# Altium PCB AcutuatorPCB.PcbDoc (part 1 of 2)
Units mm, origin at the board's own origin, x right, y up, seen from the top; angles counter-clockwise.
Board outline 80 x 80 mm, 2 copper layers (Top Layer, Bottom Layer), stack 1.57 mm thick; 63 components, 62 nets, 262 pads, 76 vias.
Unrouted connection lines stored in the file: 57.
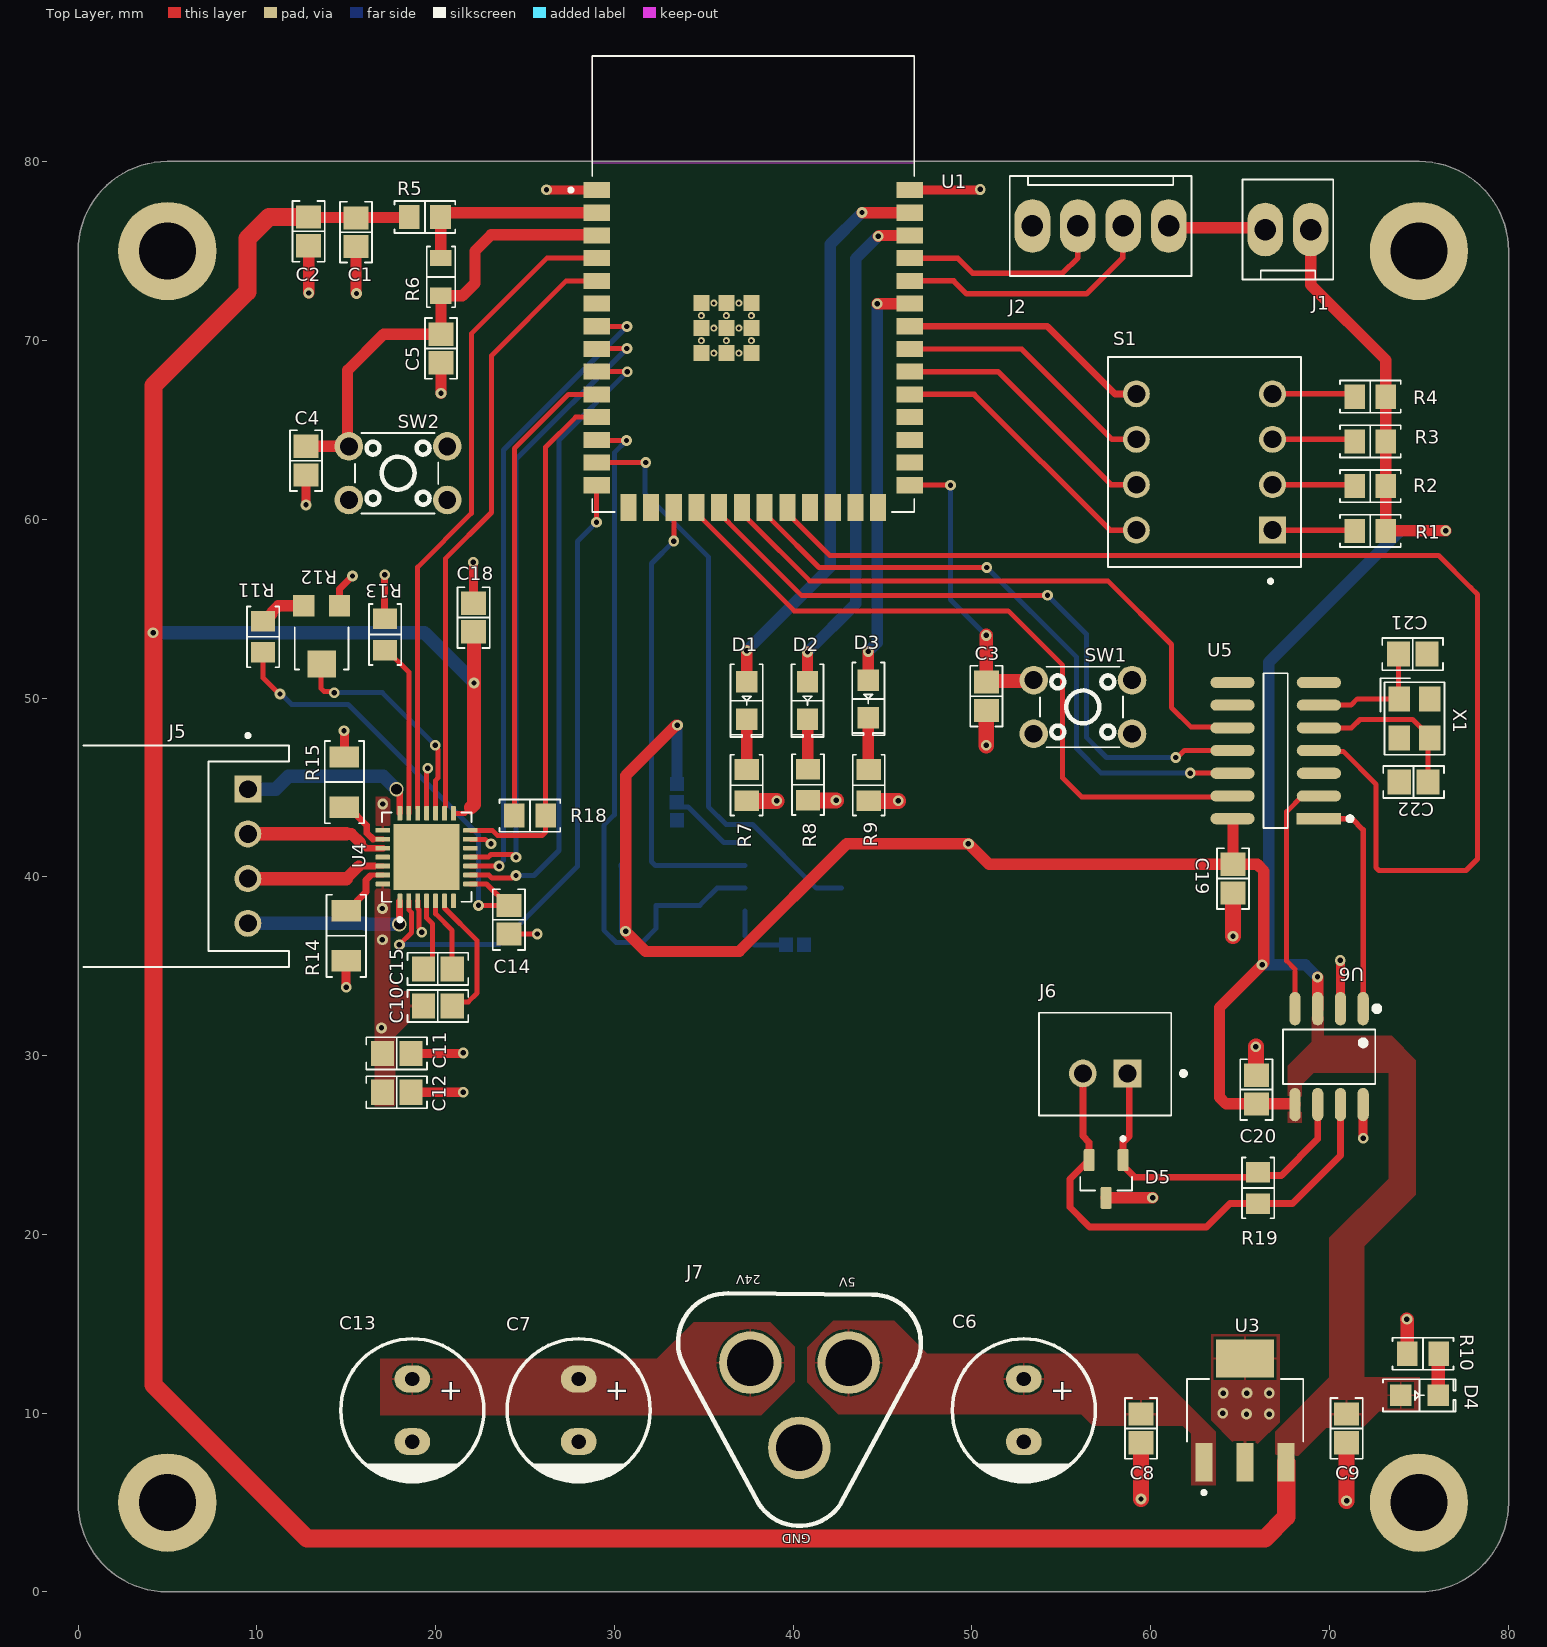
[diagram p0: Top Layer view]
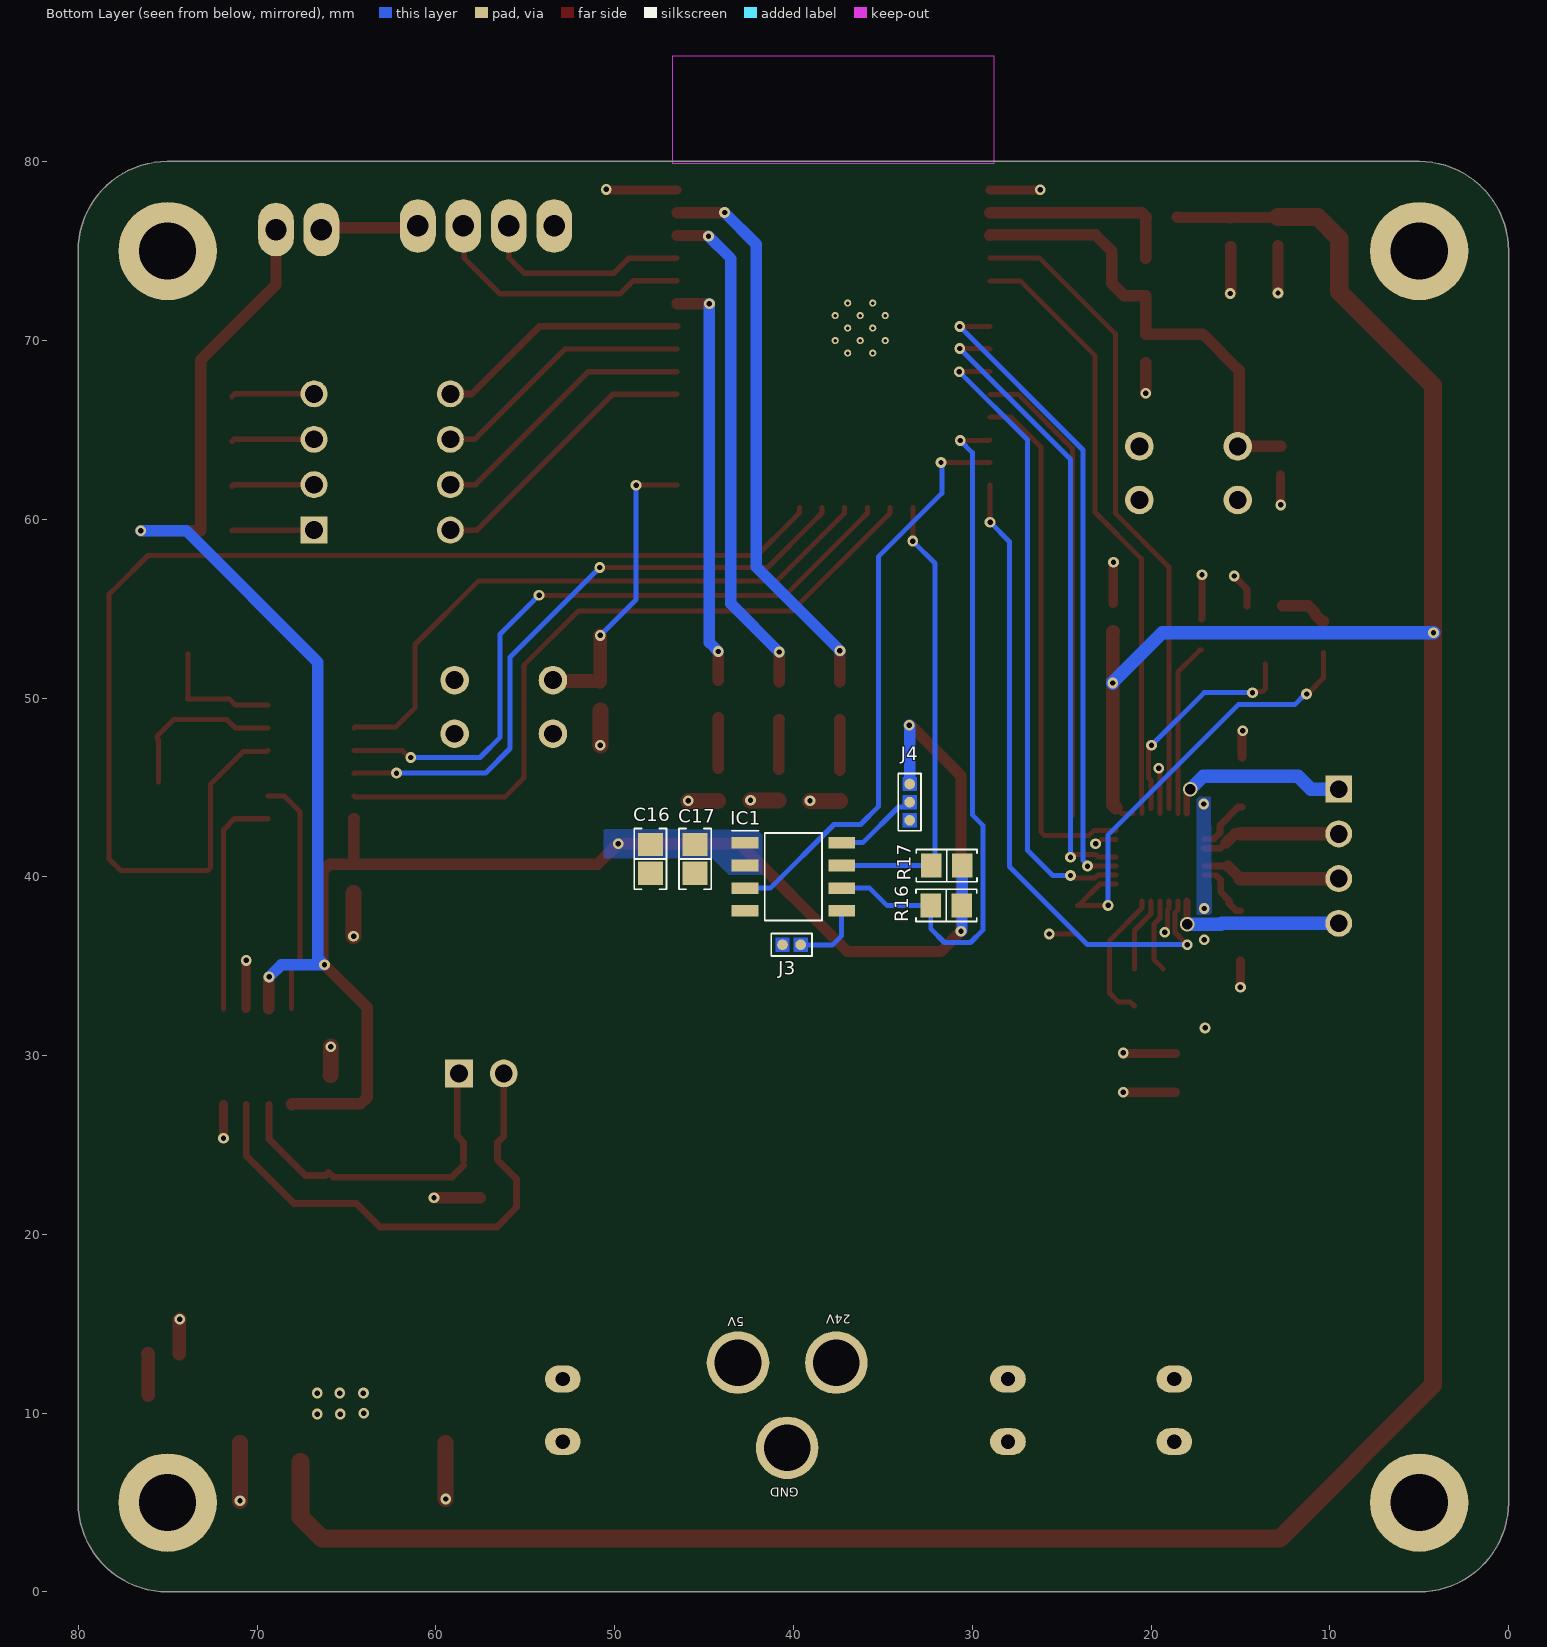
[diagram p1: Bottom Layer view, seen from below]
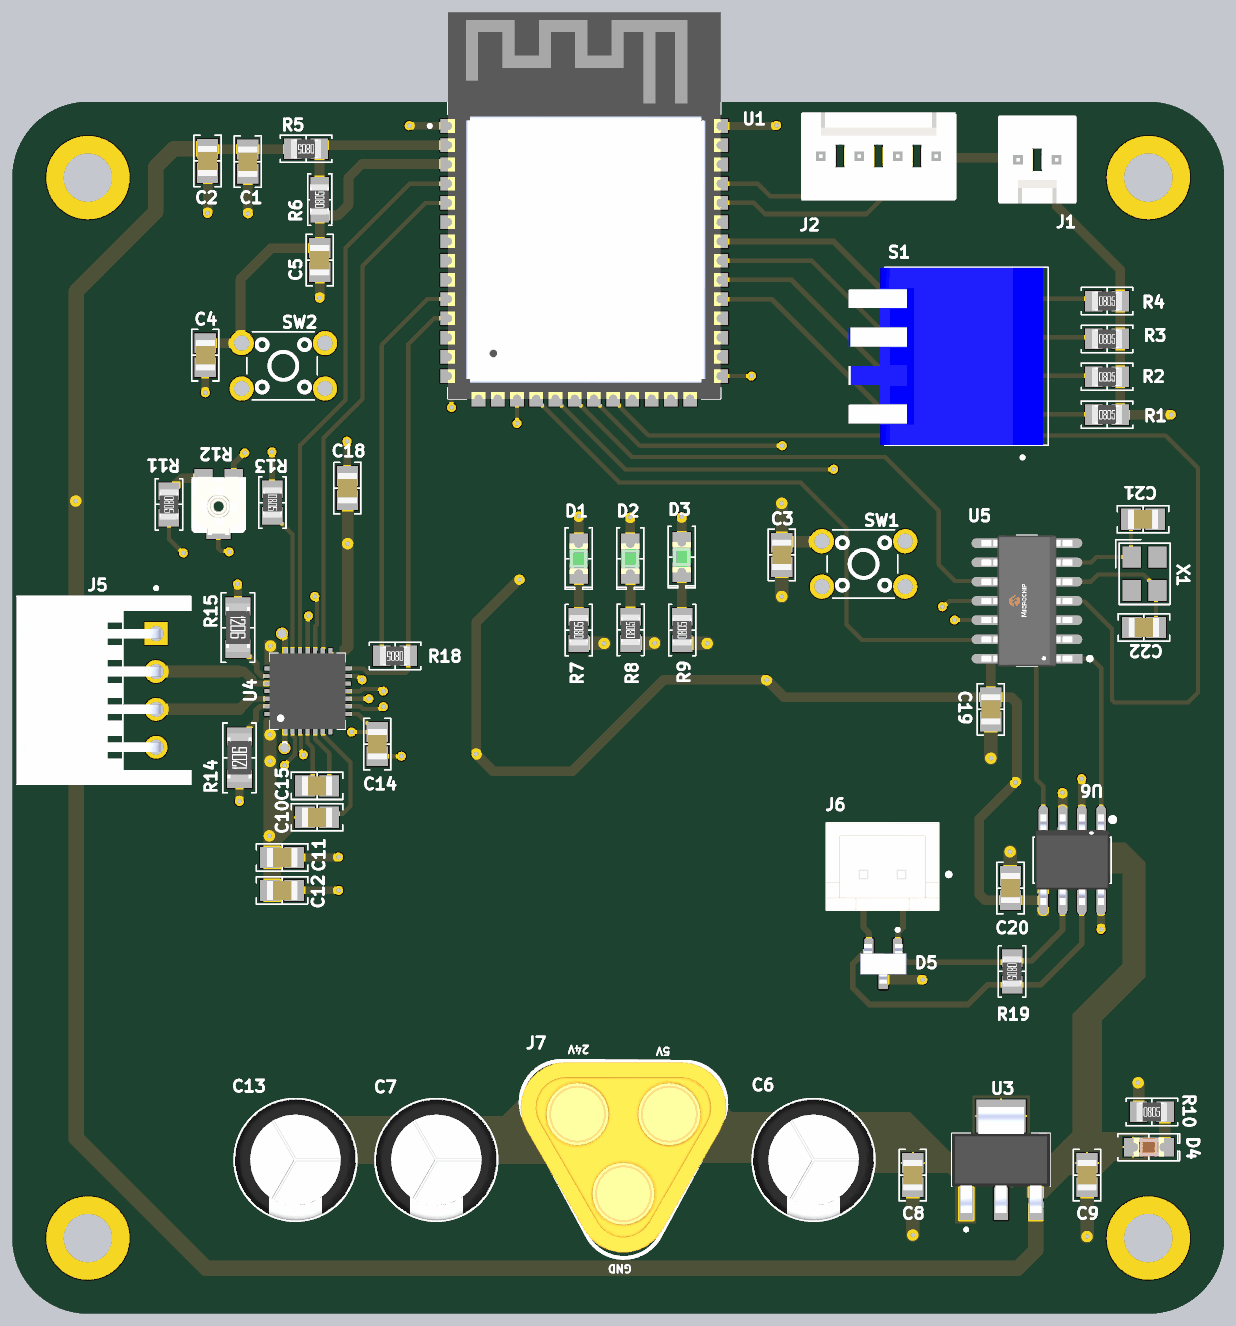
[diagram p2: 3D render of the assembled board from above, using the file's embedded part models]
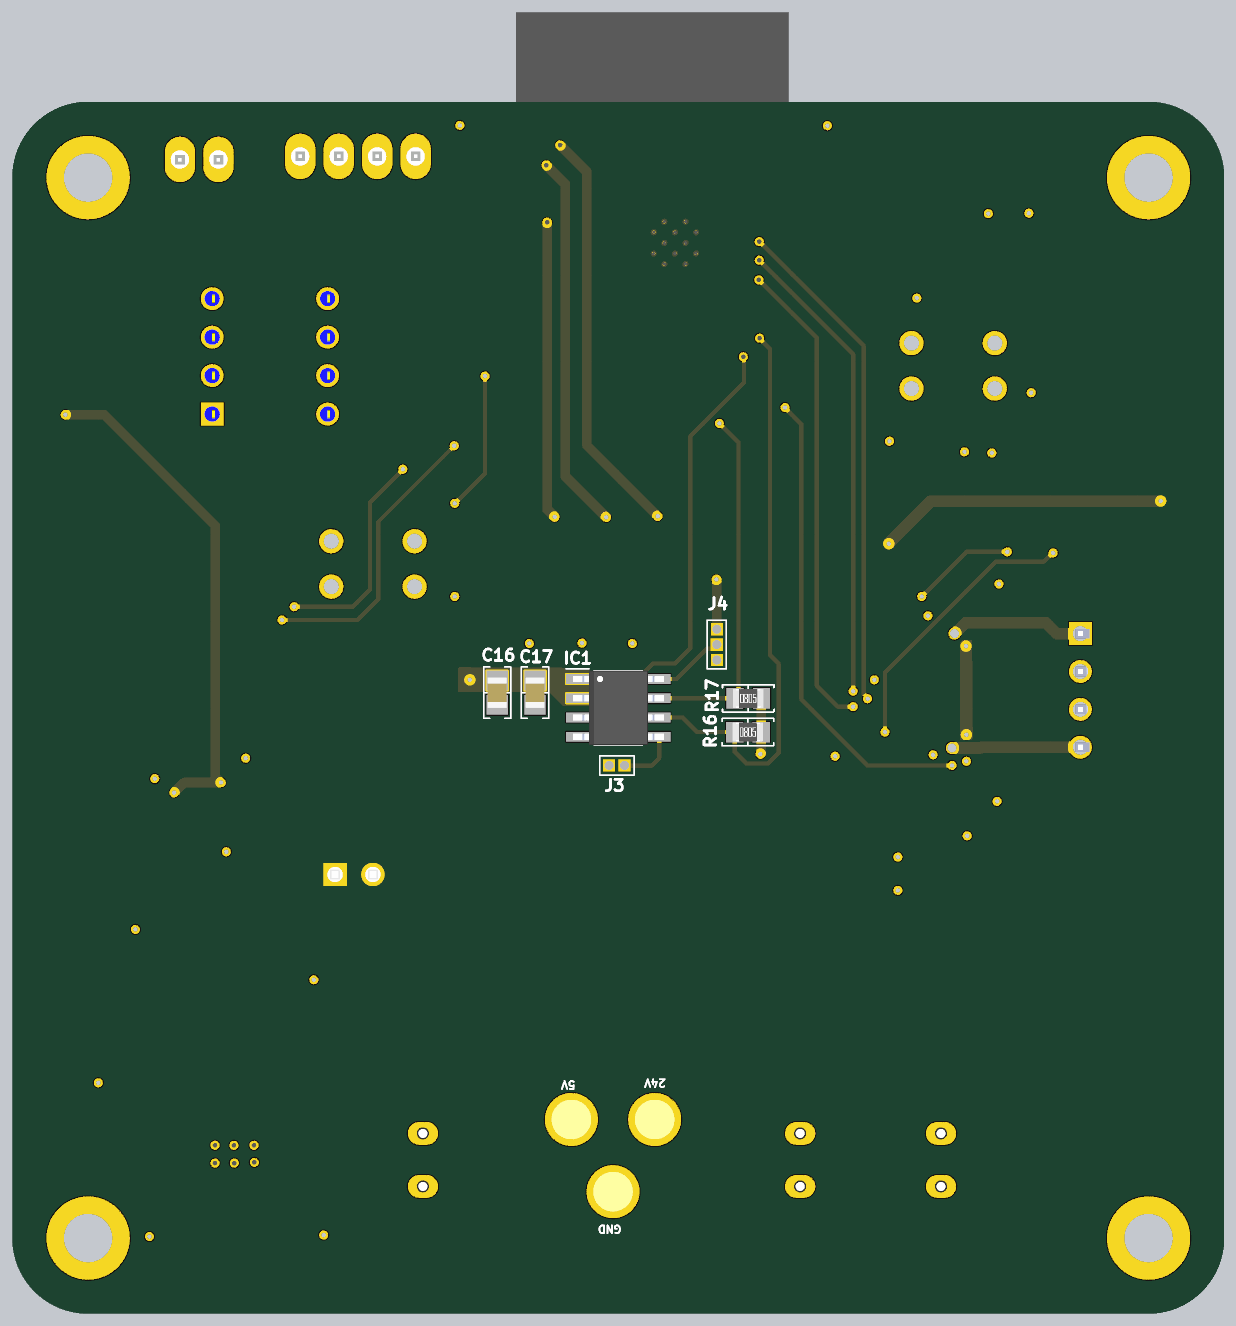
[diagram p3: 3D render of the assembled board from below, using the file's embedded part models]

## Layer stack, top to bottom
Top Solder: solder mask 0.0127, Solder Resist, Dk 3.8
Top Layer: signal copper 0.035
Dielectric: core 1.5, FR-4, Dk 4.5
Bottom Layer: signal copper 0.035
Bottom Solder: solder mask 0.0127, Solder Resist, Dk 3.8

## Board outline
0.006,5.006 0.006,75.006 cw(c5.006,75.006) 5.006,80.006 75.006,80.006 cw(c75.006,75.006) 80.006,75.006 80.006,5.006 cw(c75.006,5.006) 75.006,0.006 5.006,0.006 cw(c5.006,5.006)

## Design rules (kind name [scope] priority, off if disabled: settings)
BoardOutlineClearance [All] p1: gap=0.2 ignorepadtopadclearanceinfootprint=FALSE
Clearance [All] p1: gap=0.127 ignorepadtopadclearanceinfootprint=FALSE except(0.25: Arc-Hole Track-Hole SMDPad-Hole THPad-Hole Via-Hole Fill-Hole Poly-Hole Region-Hole Text-Hole)
ComponentClearance [All] p1: gap=0.127 collisioncheckmode=3 verticalgap=0.127 showdistances=TRUE
DiffPairsRouting [All] p1: maxlimit=0.254 minlimit=0.127 mostfreqgap=0.127 toplayer_minwidth=0.127 toplayer_maxwidth=25.4 toplayer_prefwidth=0.127 bottomlayer_minwidth=0.127 bottomlayer_maxwidth=25.4 bottomlayer_prefwidth=0.127 maxuncoupledlength=12.7
Height [All] p1: minheight=0 maxheight=1816.048 prefheight=12.7
HoleSize [All] p1: absolutevalues=TRUE maxlimit=6.3 minlimit=0.3 maxpercent=80.000 minpercent=20.000
HoleToHoleClearance [All] p1: gap=0.25 allowstackedmicrovias=FALSE
MinimumAnnularRing [All] p1: minimumring=0.076
MinimumSolderMaskSliver [All] p1: minsoldermaskwidth=0
PlaneClearance [All] p1: clearance=0.127
PlaneConnect PlaneConnectPowerPads [InPadClass('PowerPads')] p1: planeconnectstyle=Direct reliefexpansion=0.508 reliefentries=4 reliefconductorwidth=0.254 reliefairgap=0.254
PlaneConnect [All] p2: pad.planeconnectstyle=Relief pad.reliefexpansion=0.3 pad.reliefentries=4 pad.reliefconductorwidth=0.127 pad.reliefairgap=0.127 via.planeconnectstyle=Direct via.reliefexpansion=0.3 via.reliefentries=4 via.reliefconductorwidth=0.127 via.reliefairgap=0.127
PolygonConnect PolygonConnectPowerPads [All vs (InPadClass('PowerPads'))] p1: connectstyle=Direct reliefconductorwidth=0.254 reliefentries=4 polygonreliefangle="90 Angle" airgapwidth=0.254
PolygonConnect [All] p2: thpad.connectstyle=Relief thpad.reliefconductorwidth=0.127 thpad.reliefentries=4 thpad.polygonreliefangle="90 Angle" thpad.airgapwidth=0.127 smdpad.connectstyle=Relief smdpad.reliefconductorwidth=0.127 smdpad.reliefentries=4 smdpad.polygonreliefangle="90 Angle" smdpad.airgapwidth=0.127 via.connectstyle=Direct via.reliefconductorwidth=0.127 via.reliefentries=4 via.polygonreliefangle="90 Angle" via.airgapwidth=0.127
RoutingVias [All] p1: holewidth=0.3 width=0.6 viastyle="Through Hole" minholewidth=0.3 minwidth=0.6 maxholewidth=0.6 maxwidth=6.6
SilkToSilkClearance [All] p1: silktosilkclearance=0
SilkToSolderMaskClearance [IsPad] p1: minsilkscreentomaskgap=0.127 clearancetoexposedcopper=TRUE
SolderMaskExpansion [All] p1: expansion=0.075 istentingtop=FALSE
SupplyNets "Schematic Supply Nets_4" [InNet('GND')] p1: voltage=0.000
SupplyNets "Schematic Supply Nets_3" [InNet('VS')] p2: voltage=0.000
SupplyNets "Schematic Supply Nets_2" [InNet('ESP_3V3')] p3: voltage=0.000
SupplyNets "Schematic Supply Nets_1" [InNet('VCC_3V3')] p4: voltage=0.000
SupplyNets "Schematic Supply Nets" [InNet('+5')] p5: voltage=0.000
Width [All] p1: maxlimit=25.4 minlimit=0.127 preferedwidth=0.127 minimp=50.000000 maximp=50.000000 favimp=50.000000
20 further rules are at their usual default settings.

## Components (designator, comment, footprint, x,y, rotation, side; value= is the part's Value field where it differs from the comment)
C1 "0.1 µF" "CAP 0805_2012" 15.55,76.05 r90 top
C2 "10 µF" "CAP 0805_2012" 12.9,76.1 r90 top
C3 "0.1 µF" "CAP 0805_2012" 50.8,50.1 r90 top
C4 "0.1 µF" "CAP 0805_2012" 12.75,63.275 r90 top
C5 "1 µF" "CAP 0805_2012" 20.3,69.55 r90 top
C6 "100 µF" "CAP AL TH D8 L3.5 H12.5" 52.9,10.16 r270 top
C7 "100 µF" "CAP AL TH D8 L3.5 H12.5" 28,10.16 r270 top
C8 "10 µF" "CAP 0805_2012" 59.45,9.15 r90 top
C9 "10 µF" "CAP 0805_2012" 70.95,9.15 r90 top
C10 "0.1 µF" "CAP 0805_2012" 20.125,32.775 r180 top
C11 "0.1 µF" "CAP 0805_2012" 17.825,30.125 r180 top
C12 "0.1 µF" "CAP 0805_2012" 17.825,27.95 r180 top
C13 "100 µF" "CAP AL TH D8 L3.5 H12.5" 18.7,10.16 r270 top
C14 "2.2µF" "CAP 0805_2012" 24.1,37.6 r270 top
C15 "0.022 µF" "CAP 0805_2012" 20.125,34.85 r0 top
C16 "0.1 µF" "CAP 0805_2012" 48,41 r90 bottom
C17 "10 µF" "CAP 0805_2012" 45.5,41 r90 bottom
C18 "0.1 µF" "CAP 0805_2012" 22.125,54.5 r270 top
C19 "0.1 µF" "CAP 0805_2012" 64.6,39.9 r90 top
C20 "0.1 µF" "CAP 0805_2012" 65.9,28.1 r270 top
C21 "22 pF" "CAP 0805_2012" 74.65,52.45 r180 top
C22 "22 pF" "CAP 0805_2012" 74.7,45.3 r0 top
D1 "Green" "LED 0805_2012 GREEN" 37.4,49.85 r270 top
D2 "Green" "LED 0805_2012 GREEN" 40.8,49.85 r270 top
D3 "Green" "LED 0805_2012 GREEN" 44.2,49.95 r270 top
D4 "Red" "LED 0805_2012 RED" 75.025,11 r0 top
D5 "NUP2105L" SOT95P240X120-3N 57.5,23.1 r270 top
IC1 "AS5600-ASOT" SOIC127P600X175-8N 40,40 r180 bottom
J1 "0022272021" "MOLEX KK 0022272021" 67.67,76.2 r0 top
J2 "0022272041" "MOLEX KK 0022272041" 57.19,76.4 r180 top
J3 "2Pin" 2Pin 40.1,36.2 r0 bottom
J4 "3Pin" Solder_Bridge 33.5,44.175 r270 bottom
J5 "S4B-XH-A" JST_S4B-XH-A 3.8,41.15 r270 top
J6 "B2B-XH-A(LF)(SN)" FP-B2B-XH-A_LF_SN-MFG 57.45,29.525 r180 top
J7 "MT-60" MT-60 40.35,11.43 r180 top
R1 "10 kOhms" "RES 0805_2012" 72.275,59.35 r0 top
R2 "10 kOhms" "RES 0805_2012" 72.275,61.85 r0 top
R3 "10 kOhms" "RES 0805_2012" 72.275,64.35 r0 top
R4 "10 kOhms" "RES 0805_2012" 72.275,66.85 r0 top
R5 "0 Ohms" "RES 0805_2012" 19.4,76.9 r180 top
R6 "10 kOhms" "YAGEO RES 0805_2012" 20.3,73.55 r90 top
R7 "470 Ohms" "RES 0805_2012" 37.4,45.125 r90 top
R8 "470 Ohms" "RES 0805_2012" 40.825,45.15 r90 top
R9 "470 Ohms" "RES 0805_2012" 44.225,45.125 r90 top
R10 "1 kOhms" "RES 0805_2012" 75.225,13.325 r0 top
R11 "10 kOhms" "RES 0805_2012" 10.35,53.425 r270 top
R12 "10 kOhms" "POT BOURNS TRIMPOT TC33" 13.625,53.35 r180 top
R13 "100 kOhms" "RES 0805_2012" 17.175,53.55 r270 top
R14 "120 mOhms" "RES 1206_3216" 15,36.7 r90 top
R15 "120 mOhms" "RES 1206_3216" 14.9,45.3 r270 top
R16 "4.7 kOhms" "RES 0805_2012" 31.45,38.4 r180 bottom
R17 "4.7 kOhms" "RES 0805_2012" 31.425,40.625 r180 bottom
R18 "1 kOhms" "RES 0805_2012" 25.275,43.425 r180 top
R19 "120 Ohms" "RES 0805_2012" 66,22.6 r270 top
S1 "DS02C-254-1L-04BE" SW_DS02C-254-1L-04BE 63,63.2 r90 top
SW1 "4.5X4.5X5.0WATERPROOF TACT SWITCH DIP 260G" SW-TH_4P-L4.5-W4.5-P3.00-LS5.5 56.2,49.5 r180 top
SW2 "4.5X4.5X5.0WATERPROOF TACT SWITCH DIP 260G" SW-TH_4P-L4.5-W4.5-P3.00-LS5.5 17.9,62.575 r180 top
U1 "ESP32-S3-WROOM-1-N4R2" XCVR_ESP32-S3-WROOM-1-N4R2 37.765,73.15 r0 top
U3 "TL1963A-33DCYR" VREG_TL1963A-33DCYR 65.275,10.16 r90 top
U4 "TMC2209-LA-T" QFN50P500X500X90-29N 19.5,41.1 r90 top
U5 "MCP2518FDT-E/SL" FP-C04-065-SL-IPC_A 66.984,47.06 r180 top
U6 "TCAN3413DR1" TCAN3413DR1 70,30 r180 top
X1 "40MHz" CRYSTAL-SMD_4P-L3.2-W2.5-BL 74.636,48.964 r270 top

## Footprints (in the part's own frame and the unit in brackets; to place one, negate y for a bottom-side part, rotate by r counter-clockwise, add the part's x,y. Pads: shape width x height; smd on the part's side, far side on the other; paste and mask are expansions set on the pad)
2Pin [mm]
  round 0.6 smd: 1(-0.508,0) 2(0.508,0)
  Top Layer region: 0.108,0.4 0.908,0.4 0.908,-0.4 0.108,-0.4
  Top Layer region: -0.908,0.4 -0.108,0.4 -0.108,-0.4 -0.908,-0.4
  silkscreen extent -1.14,-0.64 1.14,0.64
"CAP 0805_2012" [mm] "Chip Capacitor, 2-Leads, Body 2.00x1.20mm, IPC Medium Density"
  rect 1.3x1.4 smd: 1(-0.8,0) 2(0.8,0)
  silkscreen extent -1.7,-0.9 1.7,0.9, body extent -1,-0.64 1,0.64, height 1.26
"CAP AL TH D8 L3.5 H12.5" [mm] "8MM Diameter, 3.5MM Lead Spacing Aluminium Capacitor"
  oval 1.5x2 hole 0.8: 1(-1.75,0) 2(1.75,0)
  silkscreen extent -4,-4 4,4, body extent -4,-4 4,4, height 11.5
CRYSTAL-SMD_4P-L3.2-W2.5-BL [mm]
  rect 1.4x1.2 smd: 1(-0.986,-0.736) 2(1.214,-0.736) 3(1.214,0.964) 4(-0.986,0.964)
  silkscreen extent -2.14,-1.79 2.14,1.79
FP-B2B-XH-A_LF_SN-MFG [mm]
  rect 1.55x1.55 hole 1 paste-2539.97 mask+0: 1(-1.25,0.525)
  round 1.55 hole 1 paste-2539.97 mask+0: 2(1.25,0.525)
  silkscreen extent -4.5,-2.88 3.7,2.88, body extent -3.8,-2.98 3.8,2.98, height 0.25
FP-C04-065-SL-IPC_A [mm]
  rect 2.474x0.622 smd paste+0 mask+0: 1(-2.416,3.81)
  rrect100% 2.474x0.622 smd paste+0 mask+0: 2(-2.416,2.54) 3(-2.416,1.27) 4(-2.416,0) 5(-2.416,-1.27) 6(-2.416,-2.54) 7(-2.416,-3.81) 8(2.416,-3.81) 9(2.416,-2.54) 10(2.416,-1.27) 11(2.416,0) 12(2.416,1.27) 13(2.416,2.54) 14(2.416,3.81)
  silkscreen extent -4.28,-4.33 0.68,4.33, body extent -4.15,-4.82 4.15,4.82, height 0.25
JST_S4B-XH-A [mm]
  rect 1.508x1.508 / inner round 1.508 / far side rect 1.508x1.508 hole 1: 1(-3.75,5.7)
  round 1.508 hole 1: 2(-1.25,5.7) 3(1.25,5.7) 4(3.75,5.7)
  silkscreen extent -6.85,-3.5 6.2,8, body extent -6.2,-3.5 6.2,8, height 6.1
"LED 0805_2012 GREEN" [mm] "Chip Diode, 2-Leads, Body 2.00x1.25mm, IPC Medium Density"
  rect 1.2x1.2 smd: 1(-1.05,0) 2(1.05,0)
  silkscreen extent -2.03,-0.9 2.03,0.9, body extent -1,-0.62 1,0.63, height 0.9
"LED 0805_2012 RED" [mm] "Chip Diode, 2-Leads, Body 2.00x1.25mm, IPC Medium Density"
  rect 1.2x1.2 smd: 1(-1.05,0) 2(1.05,0)
  silkscreen extent -2.03,-0.9 2.03,0.9, body extent -1,-0.62 1,0.63, height 0.9
"MOLEX KK 0022272021" [mm]
  oval 2x3 hole 1.2: 1(-1.27,0) 2(1.27,0)
  silkscreen extent -2.54,-2.79 2.54,2.79, body extent -2.54,-2.9 2.54,2.9, height 11.7
"MOLEX KK 0022272041" [mm]
  oval 2x3 hole 1.2: 1(-3.81,0) 2(-1.27,0) 3(1.27,0) 4(3.81,0)
  silkscreen extent -5.08,-2.79 5.08,2.79, body extent -5.08,-2.9 5.08,2.9, height 11.7
MT-60 [mm]
  round 3.5 hole 2.605: 1(-2.75,-1.397) 2(0,3.366) 3(2.75,-1.397)
  silkscreen extent -6.79,-5.27 6.79,7.74, body extent -6.8,-5.2 6.8,7.39, height 15
"POT BOURNS TRIMPOT TC33" [mm] "Bourns Trimpot TC33X-1 - Open Frame 3mm x 3.8mm x 1.2mm"
  rect 1.2x1.2 smd: 1(-1,-1.8) 3(1,-1.8)
  rect 1.6x1.5 smd: 2(0,1.45)
  silkscreen extent -1.5,-0.6 1.5,1.75, body extent -1.8,-1.91 1.8,1.95, height 1.15
QFN50P500X500X90-29N [mm]
  rrect25% 0.81x0.27 smd: 1(-2.45,1.5) 2(-2.45,1) 3(-2.45,0.5) 4(-2.45,0) 5(-2.45,-0.5) 6(-2.45,-1) 7(-2.45,-1.5) 15(2.45,-1.5) 16(2.45,-1) 17(2.45,-0.5) 18(2.45,0) 19(2.45,0.5) 20(2.45,1) 21(2.45,1.5)
  rrect25% 0.27x0.81 smd: 8(-1.5,-2.45) 9(-1,-2.45) 10(-0.5,-2.45) 11(0,-2.45) 12(0.5,-2.45) 13(1,-2.45) 14(1.5,-2.45) 22(1.5,2.45) 23(1,2.45) 24(0.5,2.45) 25(0,2.45) 26(-0.5,2.45) 27(-1,2.45) 28(-1.5,2.45)
  rect 3.7x3.7 smd paste-0.68: 29(0,0)
  silkscreen extent -3.6,-2.5 2.5,2.5, body extent -2.5,-2.5 2.5,2.5, height 0.9
"RES 0805_2012" [mm] "Chip Resistor, 2-Leads, Body 2.00x1.25mm, IPC Medium Density"
  rect 1.15x1.35 smd: 1(-0.875,0) 2(0.875,0)
  silkscreen extent -1.7,-0.9 1.7,0.9, body extent -1,-0.62 1,0.63, height 0.6
"RES 1206_3216" [mm] "Chip Resistor, 2-Leads, Body 3.13x1.55mm, IPC Medium Density"
  rect 1.2x1.65 smd: 1(-1.4,0) 2(1.4,0)
  silkscreen extent -2.3,-1.1 2.3,1.1, body extent -1.6,-0.8 1.6,0.8, height 0.6
SOIC127P600X175-8N [mm]
  rect 1.5x0.65 smd: 1(-2.7,1.905) 2(-2.7,0.635) 3(-2.7,-0.635) 4(-2.7,-1.905) 5(2.7,-1.905) 6(2.7,-0.635) 7(2.7,0.635) 8(2.7,1.905)
  silkscreen extent -3.45,-2.45 1.6,2.58, body extent -3,-2.45 3,2.45, height 1.75
Solder_Bridge [mm]
  round 0.6 smd: 1(-1.016,0) 2(1.016,0) 3(0,0)
  Top Layer region: 0.616,0.4 1.416,0.4 1.416,-0.4 0.616,-0.4
  Top Layer region: -1.416,0.4 -0.616,0.4 -0.616,-0.4 -1.416,-0.4
  Top Layer region: -0.406,0.406 0.406,0.406 0.406,-0.406 -0.406,-0.406
  silkscreen extent -1.6,-0.64 1.6,0.64
SOT95P240X120-3N [mm]
  rrect25% 1.23x0.6 smd paste+0 mask+0.102: 1(-1.06,0.95) 2(-1.06,-0.95) 3(1.06,0)
  silkscreen extent -2.35,-1.45 0.65,1.45, body extent -1.3,-1.52 1.3,1.52, height 1.3
SW-TH_4P-L4.5-W4.5-P3.00-LS5.5 [mm]
  round 1.6 hole 1: 1(-2.75,1.5) 2(2.75,1.5) 3(-2.75,-1.5) 4(2.75,-1.5)
  silkscreen extent -2.25,-2.25 2.4,2.25
SW_DS02C-254-1L-04BE [mm]
  rect 1.508x1.508 / inner round 1.508 / far side rect 1.508x1.508 hole 1: 1A(-3.81,-3.81)
  round 1.508 hole 1: 1B(-3.81,3.81) 2A(-1.27,-3.81) 2B(-1.27,3.81) 3A(1.27,-3.81) 3B(1.27,3.81) 4A(3.81,-3.81) 4B(3.81,3.81)
  silkscreen extent -6.77,-5.4 5.87,5.4, body extent -5.86,-5.08 5.86,7.8, height 9.46
TCAN3413DR1 [mm]
  oval 0.63x1.865 smd: 1(-1.877,-2.624) 2(-0.607,-2.624) 3(0.663,-2.624) 4(1.933,-2.624) 5(1.933,2.741) 6(0.663,2.741) 7(-0.607,2.741) 8(-1.877,2.741)
  silkscreen extent -2.79,-2.77 2.6,1.58, body extent -2.44,-2.97 2.49,3.02, height 1.73
VREG_TL1963A-33DCYR [mm]
  rect 2.15x0.95 smd: 1(-2.9,2.3) 2(-2.9,0) 3(-2.9,-2.3)
  rect 2.15x3.25 smd: 4(2.9,0)
  silkscreen extent -4.7,-3.25 1.75,3.25, body extent -3.5,-3.25 3.5,3.25, height 1.8
XCVR_ESP32-S3-WROOM-1-N4R2 [mm]
  rect 1.5x0.9 smd: 1(-8.75,5.26) 2(-8.75,3.99) 3(-8.75,2.72) 4(-8.75,1.45) 5(-8.75,0.18) 6(-8.75,-1.09) 7(-8.75,-2.36) 8(-8.75,-3.63) 9(-8.75,-4.9) 10(-8.75,-6.17) 11(-8.75,-7.44) 12(-8.75,-8.71) 13(-8.75,-9.98) 14(-8.75,-11.25) 27(8.75,-11.25) 28(8.75,-9.98) 29(8.75,-8.71) 30(8.75,-7.44) 31(8.75,-6.17) 32(8.75,-4.9) 33(8.75,-3.63) 34(8.75,-2.36) 35(8.75,-1.09) 36(8.75,0.18) 37(8.75,1.45) 38(8.75,2.72) 39(8.75,3.99) 40(8.75,5.26)
  rect 0.9x1.5 smd: 15(-6.985,-12.5) 16(-5.715,-12.5) 17(-4.445,-12.5) 18(-3.175,-12.5) 19(-1.905,-12.5) 20(-0.635,-12.5) 21(0.635,-12.5) 22(1.905,-12.5) 23(3.175,-12.5) 24(4.445,-12.5) 25(5.715,-12.5) 26(6.985,-12.5)
  rect 0.9x0.9 smd: 41_1(-1.5,-2.46) 41_2(-2.9,-2.46) 41_3(-0.1,-2.46) 41_4(-2.9,-3.86) 41_5(-1.5,-3.86) 41_6(-0.1,-3.86) 41_7(-2.9,-1.06) 41_8(-1.5,-1.06) 41_9(-0.1,-1.06)
  round 0.4 hole 0.2 mask+0: 41_10(-1.5,-1.76) 41_11(-2.9,-1.76) 41_12(-0.1,-1.76) 41_13(-2.9,-3.16) 41_14(-1.5,-3.16) 41_15(-0.1,-3.16) 41_16(-2.2,-1.06) 41_17(-0.8,-1.06) 41_18(-2.2,-2.46) 41_19(-0.8,-2.46) 41_20(-2.2,-3.86) 41_21(-0.8,-3.86)
  Keep-Out Layer region: 9,6.75 -9,6.75 -9,12.75 9,12.75
  Keep-Out Layer region: 9,6.75 -9,6.75 -9,12.75 9,12.75
  silkscreen extent -10.3,-12.75 9,12.75, body extent -9,-12.75 9,12.75, height 3.25
"YAGEO RES 0805_2012" [mm] "Chip Resistor, 2-Leads, Body 2.00x1.25mm"
  rect 0.9x1.2 smd: 1(-1.05,0) 2(1.05,0)
  silkscreen extent -1.7,-0.8 1.7,0.8, body extent -1,-0.62 1,0.63, height 0.6

## Part data
C1: library part C0805C104M5RACAUTO, "CAP CER 0.1UF 50V X7R 0805", Device Package="0805 (2012 Metric)", Manufacturer=KEMET, Operating Temperature="-55°C ~ 125°C", Ratings=AEC-Q200, Supplier Part Number 1=399-12977-1-ND, Temperature Coefficient=X7R, Tolerance=±20%, Voltage - Rated=50V, Applications="Automotive, Bypass, Decoupling", Capacitance="0.1 µF", componentlink1description=Datasheet, componentlink1url=https://api.kemet.com/component-edge/download/datasheet/C0805C104M5RACAUTO.pdf, ComponentLink2Description="DigiKey Link", ComponentLink2URL=https://www.digikey.com/en/products/detail/kemet/C0805C104M5RACAUTO/5762233, lastupdated="4/6/2026 7:33:18 PM", Lifecycle Status=Active, Minimum Order=1, Mounting Type="Surface Mount, MLCC", Package / Case="0805 (2012 Metric)", Packaging=TapeAndReel, Part Number=C0805C104M5RACAUTO, Part Status=Active, partid=2568, price=0.02, Series="SMD Auto X7R", Size / Dimension="0.079\" L x 0.049\" W (2.00mm x 1.25mm)", Supplier 1=DigiKey, Thickness (Max)="0.035\" (0.88mm)"
C2: library part CL21B106KAYQNNE, "CAP CER 10UF 25V X7R 0805", Device Package="0805 (2012 Metric)", Manufacturer="Samsung Electro-Mechanics", Operating Temperature="-55°C ~ 125°C", Supplier Part Number 1=1276-CL21B106KAYQNNECT-ND, Temperature Coefficient=X7R, Tolerance=±10%, Voltage - Rated=25V, Applications="General Purpose", Capacitance="10 µF", componentlink1description=Datasheet, componentlink1url=https://www.samsungsem.com/resources/file/global/support/product_catalog/MLCC.pdf, ComponentLink2Description="DigiKey Link", ComponentLink2URL=https://www.digikey.com/en/products/detail/samsung-electro-mechanics/CL21B106KAYQNNE/16573002, lastupdated="4/6/2026 7:29:13 PM", Lifecycle Status=Active, Minimum Order=1, Mounting Type="Surface Mount, MLCC", Package / Case="0805 (2012 Metric)", Packaging=TapeAndReel, Part Number=CL21B106KAYQNNE, partid=72453, price=0.06, Series=CL, Size / Dimension="0.079\" L x 0.049\" W (2.00mm x 1.25mm)", Supplier 1=DigiKey, Thickness (Max)="0.057\" (1.45mm)"
C3 C4 C11 C12 C16 C19 C20: library part CC0805MRX7R9BB104, "CAP CER 0.1UF 50V X7R 0805", Device Package="0805 (2012 Metric)", Manufacturer=Yageo, Operating Temperature="-55°C ~ 125°C", Supplier Part Number 1=311-4351-1-ND, Temperature Coefficient=X7R, Tolerance=±20%, Voltage - Rated=50V, Applications="General Purpose", Capacitance="0.1 µF", componentlink1description=Datasheet, componentlink1url=https://www.yageo.com/upload/media/product/productsearch/datasheet/mlcc/UPY-GPHC_X7R_6.3V-to-50V_18.pdf, ComponentLink2Description="DigiKey Link", ComponentLink2URL=https://www.digikey.com/en/products/detail/yageo/CC0805MRX7R9BB104/5884281, lastupdated="4/6/2026 7:33:19 PM", Lifecycle Status=Active, Minimum Order=1, Mounting Type="Surface Mount, MLCC", Package / Case="0805 (2012 Metric)", Packaging=TapeAndReel, Part Number=CC0805MRX7R9BB104, Part Status=Active, partid=2475, price=0.01, Series=CC, Size / Dimension="0.079\" L x 0.049\" W (2.00mm x 1.25mm)", Supplier 1=DigiKey, Thickness (Max)="0.037\" (0.95mm)"
C5: library part C2012X8R1C105K125AB, "CAP CER 1UF 16V X8R 0805", Device Package="0805 (2012 Metric)", Manufacturer="TDK Corporation", Operating Temperature="-55°C ~ 150°C", Supplier Part Number 1=445-8829-1-ND, Temperature Coefficient=X8R, Tolerance=±10%, Voltage - Rated=16V, Applications="General Purpose", Capacitance="1 µF", componentlink1description=Datasheet, componentlink1url=https://product.tdk.com/info/en/catalog/datasheets/mlcc_commercial_hightemp_en.pdf?ref_disty=digikey, ComponentLink2Description="DigiKey Link", ComponentLink2URL=https://www.digikey.com/en/products/detail/tdk-corporation/C2012X8R1C105K125AB/3248171, Features="High Temperature", lastupdated="4/6/2026 7:33:17 PM", Lifecycle Status=Active, Minimum Order=1, Mounting Type="Surface Mount, MLCC", Package / Case="0805 (2012 Metric)", Packaging=TapeAndReel, Part Number=C2012X8R1C105K125AB, Part Status=Active, partid=2997, price=0.07, Series=C, Size / Dimension="0.079\" L x 0.049\" W (2.00mm x 1.25mm)", Supplier 1=DigiKey, Thickness (Max)="0.057\" (1.45mm)"
C6: library part UKL1C101MPD1TD, "CAP ALUM 100UF 20% 16V RADIAL", Device Package="Radial, Can", Lifetime @ Temp.="2000 Hrs @ 85°C", Manufacturer=Nichicon, Operating Temperature="-40°C ~ 85°C", Ripple Current @ High Frequency="345 mA @ 10 kHz", Ripple Current @ Low Frequency="230 mA @ 120 Hz", Supplier Part Number 1=493-10478-1-ND, Tolerance=±20%, Voltage - Rated="16 V", Applications="General Purpose", Capacitance="100 µF", componentlink1description=Datasheet, componentlink1url=http://nichicon-us.com/english/products/pdfs/e-ukl.pdf, ComponentLink2Description="DigiKey Link", ComponentLink2URL=https://www.digikey.com/en/products/detail/nichicon/UKL1C101MPD1TD/4317967, Height - Seated (Max)="0.492\" (12.50mm)", lastupdated="4/5/2026 8:45:14 PM", Lead Spacing="0.138\" (3.50mm)", Lifecycle Status=Active, Minimum Order=1, Mounting Type="Through Hole", Package / Case="Radial, Can", Packaging=TapeAndBox, Part Number=UKL1C101MPD1TD, Part Status=Active, partid=7193, Polarization=Polar, price=0.16, Series=UKL, Size / Dimension="0.315\" Dia (8.00mm)", Supplier 1=DigiKey
C7: library part UKW1H101MPD1TD, "CAP ALUM 100UF 20% 50V RADIAL", Device Package="Radial, Can", Lifetime @ Temp.="2000 Hrs @ 85°C", Manufacturer=Nichicon, Operating Temperature="-40°C ~ 85°C", Ripple Current @ High Frequency="375 mA @ 10 kHz", Ripple Current @ Low Frequency="250 mA @ 120 Hz", Supplier Part Number 1=493-10760-1-ND, Tolerance=±20%, Voltage - Rated="50 V", Applications=Audio, Capacitance="100 µF", componentlink1description=Datasheet, componentlink1url=http://nichicon-us.com/english/products/pdfs/e-ukw.pdf, ComponentLink2Description="DigiKey Link", ComponentLink2URL=https://www.digikey.com/en/products/detail/nichicon/UKW1H101MPD1TD/4317338, Height - Seated (Max)="0.492\" (12.50mm)", lastupdated="4/5/2026 8:45:14 PM", Lead Spacing="0.138\" (3.50mm)", Lifecycle Status=Active, Minimum Order=1, Mounting Type="Through Hole", Package / Case="Radial, Can", Packaging=TapeAndBox, Part Number=UKW1H101MPD1TD, Part Status=Active, partid=7204, Polarization=Polar, price=0.23, Series=UKW, Size / Dimension="0.315\" Dia (8.00mm)", Supplier 1=DigiKey
C8 C9 C17: library part CL21Y106KPQVPNE, "CAP CER 10UF 10V X7S 0805", Device Package="0805 (2012 Metric)", Manufacturer="Samsung Electro-Mechanics", Operating Temperature="-55°C ~ 125°C", Ratings=AEC-Q200, Supplier Part Number 1=1276-6685-1-ND, Temperature Coefficient=X7S, Tolerance=±10%, Voltage - Rated=10V, Applications=Automotive, Capacitance="10 µF", componentlink1description=Datasheet, componentlink1url=http://www.samsungsem.com/kr/support/product-search/mlcc/CL21Y106KPQVPNE.jsp, ComponentLink2Description="DigiKey Link", ComponentLink2URL=https://www.digikey.com/en/products/detail/samsung-electro-mechanics/CL21Y106KPQVPNE/5961169, Features="General Purpose", lastupdated="4/6/2026 7:33:17 PM", Lifecycle Status=Active, Minimum Order=1, Mounting Type="Surface Mount, MLCC, Epoxy", Package / Case="0805 (2012 Metric)", Packaging=TapeAndReel, Part Number=CL21Y106KPQVPNE, Part Status=Active, partid=2979, price=0.06, Series=CL, Size / Dimension="0.079\" L x 0.049\" W (2.00mm x 1.25mm)", Supplier 1=DigiKey, Thickness (Max)="0.055\" (1.40mm)"
C10: library part 0805B104K160CT, "CAP CER 0.1UF 16V X7R 0805", Device Package="0805 (2012 Metric)", Manufacturer="Walsin Technology Corporation", Operating Temperature="-55°C ~ 125°C", Supplier Part Number 1=1292-1565-1-ND, Temperature Coefficient=X7R, Tolerance=±10%, Voltage - Rated=16V, Applications="General Purpose", Capacitance="0.1 µF", componentlink1description=Datasheet, componentlink1url=http://www.passivecomponent.com/wp-content/uploads/2018/10/MLCC.pdf, ComponentLink2Description="DigiKey Link", ComponentLink2URL=https://www.digikey.com/en/products/detail/walsin-technology-corporation/0805B104K160CT/9355062, lastupdated="4/6/2026 7:33:11 PM", Lifecycle Status=Active, Minimum Order=1, Mounting Type="Surface Mount, MLCC", Package / Case="0805 (2012 Metric)", Packaging=TapeAndReel, Part Number=0805B104K160CT, Part Status=Active, partid=4882, price=0.01, Series=-, Size / Dimension="0.079\" L x 0.049\" W (2.00mm x 1.25mm)", Supplier 1=DigiKey, Thickness (Max)="0.035\" (0.90mm)"
C13: library part ECA-1HM101, "CAP ALUM 100UF 20% 50V RADIAL TH", Device Package="Radial, Can", Lifetime @ Temp.="2000 Hrs @ 85°C", Manufacturer="Panasonic Electronic Components", Operating Temperature="-40°C ~ 85°C", Ripple Current @ High Frequency="425 mA @ 10 kHz", Ripple Current @ Low Frequency="250 mA @ 120 Hz", Supplier Part Number 1=P5182-ND, Tolerance=±20%, Voltage - Rated="50 V", Applications="General Purpose", Capacitance="100 µF", componentlink1description=Datasheet, componentlink1url=//media.digikey.com/pdf/Data%20Sheets/Panasonic%20Electronic%20Components/ECA-xxM%20Series,TypeA.pdf, ComponentLink2Description="DigiKey Link", ComponentLink2URL=https://www.digikey.com/en/products/detail/panasonic-electronic-components/ECA-1HM101/245041, Height - Seated (Max)="0.492\" (12.50mm)", lastupdated="4/5/2026 8:45:14 PM", Lead Spacing="0.138\" (3.50mm)", Lifecycle Status=Active, Minimum Order=1, Mounting Type="Through Hole", Package / Case="Radial, Can", Packaging=Bulk, Part Number=ECA-1HM101, Part Status=Active, partid=7199, Polarization=Polar, price=0.09, Series=M-A, Size / Dimension="0.315\" Dia (8.00mm)", Supplier 1=DigiKey
C14: library part 0805YD225KAT2A, "CAP CER 2.2UF 16V X5R 0805", Device Package="0805 (2012 Metric)", Manufacturer="AVX Corporation", Operating Temperature="-55°C ~ 85°C", Supplier Part Number 1=478-2580-1-ND, Temperature Coefficient=X5R, Tolerance=±10%, Voltage - Rated=16V, Applications="General Purpose", Capacitance=2.2µF, componentlink1description=Datasheet, componentlink1url=http://datasheets.avx.com/cx5r.pdf, ComponentLink2Description="DigiKey Link", ComponentLink2URL=http://digikey.com/product-detail/en/avx-corporation/0805YD225KAT2A/478-2580-1-ND/717525, lastupdated="9/2/2020 1:04:40 AM", Lifecycle Status=Active, Minimum Order=1, Mounting Type="Surface Mount, MLCC", Package / Case="0805 (2012 Metric)", Packaging=TapeAndReel, Part Number=0805YD225KAT2A, Part Status=Active, partid=3362, price=0.16, Series=-, Size / Dimension="0.079\" L x 0.049\" W (2.01mm x 1.25mm)", Supplier 1=DigiKey, Thickness (Max)="0.055\" (1.40mm)"
C15: library part C0805X223K5REC7210, "CAP CER 0805 22NF 50V X7R 10%", Device Package="0805 (2012 Metric)", Manufacturer=KEMET, Operating Temperature="-55°C ~ 125°C", Supplier Part Number 1=399-C0805X223K5REC7210CT-ND, Temperature Coefficient=X7R, Tolerance=±10%, Voltage - Rated=50V, Applications="Boardflex Sensitive, ESD Protection", Capacitance="0.022 µF", componentlink1description=Datasheet, componentlink1url=https://api.kemet.com/component-edge/download/datasheet/C0805X223K5REC7210.pdf, ComponentLink2Description="DigiKey Link", ComponentLink2URL=https://www.digikey.com/en/products/detail/kemet/C0805X223K5REC7210/8652064, Features="Soft Termination", lastupdated="4/6/2026 7:31:59 PM", Lifecycle Status=Active, Minimum Order=1, Mounting Type="Surface Mount, MLCC", Package / Case="0805 (2012 Metric)", Packaging=TapeAndReel, Part Number=C0805X223K5REC7210, Part Status=Active, partid=32185, price=0.05, Series="ESD SMD Comm X7R", Size / Dimension="0.079\" L x 0.049\" W (2.00mm x 1.25mm)", Supplier 1=DigiKey, Thickness (Max)="0.039\" (0.98mm)"
C18: library part 0805Y0250104KXT, "CAP CER 0.1UF 25V X7R 0805", Device Package="0805 (2012 Metric)", Manufacturer="Knowles Syfer", Operating Temperature="-55°C ~ 125°C", Supplier Part Number 1=1608-1010-1-ND, Temperature Coefficient=X7R, Tolerance=±10%, Voltage - Rated=25V, Applications="Boardflex Sensitive", Capacitance="0.1 µF", componentlink1description=Datasheet, componentlink1url=https://www.knowlescapacitors.com/getattachment/2dbfc8bc-e2b3-4b4d-afb1-43b011b9ebe0/High-Std-Voltage.aspx, ComponentLink2Description="DigiKey Link", ComponentLink2URL=https://www.digikey.com/en/products/detail/knowles-syfer/0805Y0250104KXT/5729991, Features="Soft Termination", lastupdated="4/6/2026 7:33:15 PM", Lifecycle Status=Active, Minimum Order=1, Mounting Type="Surface Mount, MLCC", Package / Case="0805 (2012 Metric)", Packaging=TapeAndReel, Part Number=0805Y0250104KXT, Part Status=Active, partid=3471, price=0.18, Series=FlexiCap™, Size / Dimension="0.079\" L x 0.049\" W (2.00mm x 1.25mm)", Supplier 1=DigiKey, Thickness (Max)="0.051\" (1.30mm)"
C21 C22: library part 885012007012, "CAP CER 22PF 16V C0G/NP0 0805", Device Package="0805 (2012 Metric)", Manufacturer="Würth Elektronik", Operating Temperature="-55°C ~ 125°C", Supplier Part Number 1=732-7816-1-ND, Temperature Coefficient="C0G, NP0", Tolerance=±5%, Voltage - Rated=16V, Applications="General Purpose", Capacitance="22 pF", componentlink1description=Datasheet, componentlink1url=https://katalog.we-online.de/pbs/datasheet/885012007012.pdf, ComponentLink2Description="DigiKey Link", ComponentLink2URL=https://www.digikey.com/en/products/detail/würth-elektronik/885012007012/5453671, lastupdated="4/6/2026 7:32:47 PM", Lifecycle Status=Active, Minimum Order=1, Mounting Type="Surface Mount, MLCC", Package / Case="0805 (2012 Metric)", Packaging=TapeAndReel, Part Number=885012007012, Part Status=Active, partid=11782, price=0.03, Series=WCAP-CSGP, Size / Dimension="0.079\" L x 0.049\" W (2.00mm x 1.25mm)", Supplier 1=DigiKey, Thickness (Max)="0.028\" (0.70mm)"
D1 D2 D3: library part 5975316507F, "LED GREEN 0805 SMD", Current - Test=20mA, Device Package="0805 (2012 Metric)", Lens Color=0.93mm, Manufacturer=Dialight, Millicandela Rating=16mcd, Supplier Device Package=0805, Supplier Part Number 1=350-4389-1-ND, Voltage - Forward (Vf) (Typ)=2.2V, Color=Green, componentlink1description=Datasheet, componentlink1url=http://www.dialightsignalsandcomponents.com/Assets/Drawings/2D_Drawings_DrawingDetailedSpec/NewDrawings/18370A.pdf, ComponentLink2Description="DigiKey Link", ComponentLink2URL=https://www.digikey.com/en/products/detail/dialight/5975316507F/9385444, Configuration=Standard, Height (Max)=0.93mm, lastupdated="4/5/2026 8:39:04 PM", Lens Size="1.40mm x 1.24mm", Lens Style="Rectangle with Flat Top", Lifecycle Status=Active, Minimum Order=1, Mounting Type="Surface Mount", Package / Case="0805 (2012 Metric)", Packaging=TapeAndReel, Part Number=5975316507F, Part Status=Active, partid=245, price=0.14, Series=597, Size / Dimension="2.00mm L x 1.25mm W", Supplier 1=DigiKey, Wavelength - Dominant=560nm
D4: library part 5990110007F, "LED RED 0805 SMD", Current - Test=20mA, Device Package="0805 (2012 Metric)", Lens Color=0.80mm, Manufacturer=Dialight, Millicandela Rating=29mcd, Supplier Device Package=0805, Supplier Part Number 1=350-4353-1-ND, Voltage - Forward (Vf) (Typ)=2.1V, Color=Red, componentlink1description=Datasheet, componentlink1url=http://www.dialightsignalsandcomponents.com/Assets/Brochures_And_Catalogs/Indication/CBI_SMD_new/Dialight_CBI_data_599-0805_Apr2018.pdf, ComponentLink2Description="DigiKey Link", ComponentLink2URL=https://www.digikey.com/en/products/detail/dialight/5990110007F/9385408, Configuration=Standard, Height (Max)=0.80mm, lastupdated="4/5/2026 8:38:27 PM", Lens Size="1.40mm x 1.25mm", Lens Style="Rectangle with Flat Top", Lifecycle Status=Active, Minimum Order=1, Mounting Type="Surface Mount", Package / Case="0805 (2012 Metric)", Packaging=TapeAndReel, Part Number=5990110007F, Part Status=Active, partid=308, price=0.04, Series=599, Size / Dimension="2.00mm L x 1.25mm W", Supplier 1=DigiKey, Viewing Angle=140°, Wavelength - Dominant=633nm
D5: "ESD, SOT-23, 0.1ÂµA, 24V, Unidir", Package="SOT-23 Diotec", Check_prices=https://www.snapeda.com/parts/NUP2105L/Diotec/view-part/?ref=eda, MF="Diotec Semiconductor", MP=NUP2105L, SnapEDA_Link=https://www.snapeda.com/parts/NUP2105L/Diotec/view-part/?ref=snap
IC1: "Hall Effect Sensor Angle External Magnet, Not Included Gull Wing", Package="SOIC-8 ams", Check_prices=https://www.snapeda.com/parts/AS5600-ASOT/ams/view-part/?ref=eda, MF=ams, MP=AS5600-ASOT, SnapEDA_Link=https://www.snapeda.com/parts/AS5600-ASOT/ams/view-part/?ref=snap
J1: "CONN HEADER VERT 2POS 2.54MM", Insulation Color=Natural, Manufacturer=Molex, Material Flammability Rating="UL94 V-0", Supplier Part Number 1=WM4111-ND, componentlink1description=Datasheet, componentlink1url=https://www.molex.com/pdm_docs/sd/022272021_sd.pdf, ComponentLink2Description="DigiKey Link", ComponentLink2URL=http://digikey.com/product-detail/en/molex/0022272021/WM4111-ND/1130577, Connector Type=Header, Contact Finish - Mating=Tin, Contact Finish - Post=Tin, Contact Finish Thickness - Mating="100.0µin (2.54µm)", Contact Length - Mating="0.295\" (7.49mm)", Contact Length - Post="0.140\" (3.56mm)", Contact Material=Brass, Contact Shape=Square, Contact Type="Male Pin", Fastening Type="Friction Lock", Insulation Height="0.461\" (11.70mm)", Insulation Material="Polyamide (PA), Nylon", lastupdated="1/12/2020 11:51:43 PM", Lifecycle Status=Active, Minimum Order=1, Mounting Type="Through Hole", Number of Positions=2, Number of Positions Loaded=All, Number of Rows=1, Overall Contact Length="0.560\" (14.22mm)", Packaging=Bulk, Part Number=0022272021, Part Status=Active, partid=76, Pitch - Mating="0.100\" (2.54mm)", price=0.27, Series="KK 6410", Shrouding="Shrouded - 1 Wall", Style="Board to Cable/Wire", Supplier 1=DigiKey, Termination=Solder
J2: "CONN HEADER VERT 4POS 2.54MM", Insulation Color=Natural, Manufacturer=Molex, Material Flammability Rating="UL94 V-0", Supplier Part Number 1=WM4113-ND, componentlink1description=Datasheet, componentlink1url=https://www.molex.com/pdm_docs/sd/022272041_sd.pdf, ComponentLink2Description="DigiKey Link", ComponentLink2URL=http://digikey.com/product-detail/en/molex/0022272041/WM4113-ND/1130579, Connector Type=Header, Contact Finish - Mating=Tin, Contact Finish - Post=Tin, Contact Finish Thickness - Mating="100.0µin (2.54µm)", Contact Length - Mating="0.295\" (7.49mm)", Contact Length - Post="0.140\" (3.56mm)", Contact Material=Brass, Contact Shape=Square, Contact Type="Male Pin", Fastening Type="Friction Lock", Insulation Height="0.461\" (11.70mm)", Insulation Material="Polyamide (PA), Nylon", lastupdated="1/12/2020 11:52:05 PM", Lifecycle Status=Active, Minimum Order=1, Mounting Type="Through Hole", Number of Positions=4, Number of Positions Loaded=All, Number of Rows=1, Overall Contact Length="0.560\" (14.22mm)", Packaging=Bulk, Part Number=0022272041, Part Status=Active, partid=78, Pitch - Mating="0.100\" (2.54mm)", price=0.40, Series="KK 6410", Shrouding="Shrouded - 1 Wall", Style="Board to Cable/Wire", Supplier 1=DigiKey, Termination=Solder
J5: Package=None, Availability=Unavailable, MP=S4B-XH-A, price=None
J6: library part CMP-2000-05888-3, "CONN HEADER VERT 2POS 2.5MM", Color=Natural, Contact Resistance=20mR, Current Rating=3A, Housing Color=White, Insulation Resistance=1GR, Max Operating Temperature=85°C, Max Voltage Rating (AC)=250V, Min Operating Temperature=-25°C, Connector Type="Male Pin", Contact Material=Brass, Contact Plating=Tin, Contact Type="Male Pin", Depth=5.75mm, Fastening Type=Detent, Housing Material=Polyamide, Lead Free="Lead Free", Lead Pitch=2.5mm, Length=7.4mm, Max Current Rating=3A, Max Voltage Rating (DC)=250V, Mount="Through Hole", Number of Contacts=2, Number of Positions=2, Number of Rows=1, Orientation=Straight, Packaging=Bulk, Pitch=2.5mm, REACH SVHC="No SVHC", Series=XH, Termination=Solder, Voltage Rating=250V, Voltage Rating (AC)=250V, Wire/Cable Gauge=22AWG
J7: LCSC part #=C99176
R1 R2 R3 R4 R11: library part CPF0805B10KE, "RES SMD 10K OHM 0.1% 1/10W 0805", Device Package="0805 (2012 Metric)", Manufacturer="TE Connectivity Passive Product", Operating Temperature="-55°C ~ 155°C", Power (Watts)="0.1W, 1/10W", Supplier Device Package=0805, Supplier Part Number 1=A106043CT-ND, Temperature Coefficient=±25ppm/°C, Tolerance=±0.1%, componentlink1description=Datasheet, componentlink1url=https://www.te.com/commerce/DocumentDelivery/DDEController?Action=srchrtrv&DocNm=1773200&DocType=DS&DocLang=English, ComponentLink2Description="DigiKey Link", ComponentLink2URL=https://www.digikey.com/en/products/detail/te-connectivity-passive-product/CPF0805B10KE/2389790, Composition="Thin Film", Height - Seated (Max)="0.026\" (0.65mm)", lastupdated="4/5/2026 8:11:26 PM", Lifecycle Status=Active, Minimum Order=1, Number of Terminations=2, Package / Case="0805 (2012 Metric)", Packaging=TapeAndReel, Part Number=CPF0805B10KE, Part Status=Active, partid=27724, price=0.09, Resistance="10 kOhms", Series="CPF, Neohm", Size / Dimension="0.079\" L x 0.049\" W (2.00mm x 1.25mm)", Supplier 1=DigiKey
R5: library part TLRZ2ATTD, "RES 0 OHM JUMPER 0805", Device Package="0805 (2012 Metric)", Manufacturer="KOA Speer Electronics, Inc.", Operating Temperature="-65°C ~ 170°C", Ratings=AEC-Q200, Supplier Device Package=0805, Supplier Part Number 1=2019-TLRZ2ATTDCT-ND, Tolerance=Jumper, componentlink1description=Datasheet, componentlink1url=http://www.koaspeer.com/catimages/Products/TLRZ/TLRZ.pdf, ComponentLink2Description="DigiKey Link", ComponentLink2URL=https://www.digikey.com/en/products/detail/koa-speer-electronics-inc/TLRZ2ATTD/9845494, Composition="Metal Element", Features="Automotive AEC-Q200, Current Sense", Height - Seated (Max)="0.022\" (0.55mm)", lastupdated="4/5/2026 8:11:26 PM", Lifecycle Status=Active, Minimum Order=1, Number of Terminations=2, Package / Case="0805 (2012 Metric)", Packaging=TapeAndReel, Part Number=TLRZ2ATTD, Part Status=Active, partid=27685, price=0.08, Resistance="0 Ohms", Series=TLRZ, Size / Dimension="0.079\" L x 0.049\" W (2.00mm x 1.25mm)", Supplier 1=DigiKey
R6: library part RT0805DRD0710KL, "RES SMD 10K OHM 0.5% 1/8W 0805", Device Package="0805 (2012 Metric)", Manufacturer=Yageo, Operating Temperature="-55°C ~ 155°C", Power (Watts)="0.125W, 1/8W", Supplier Device Package=0805, Supplier Part Number 1=311-2699-1-ND, Temperature Coefficient=±25ppm/°C, Tolerance=±0.5%, componentlink1description=Datasheet, componentlink1url=https://www.yageo.com/upload/media/product/productsearch/datasheet/rchip/PYu-RT_1-to-0.01_RoHS_L_11.pdf, ComponentLink2Description="DigiKey Link", ComponentLink2URL=https://www.digikey.com/en/products/detail/yageo/RT0805DRD0710KL/1077814, Composition="Thin Film", Height - Seated (Max)="0.024\" (0.60mm)", lastupdated="4/5/2026 9:18:18 PM", Lifecycle Status=Active, Minimum Order=1, Number of Terminations=2, Package / Case="0805 (2012 Metric)", Packaging=TapeAndReel, Part Number=RT0805DRD0710KL, Part Status=Active, partid=27797, price=0.02, Resistance="10 kOhms", Series=RT, Size / Dimension="0.079\" L x 0.049\" W (2.00mm x 1.25mm)", Supplier 1=DigiKey
R7 R8 R9: library part ERJ-PB6B4700V, "RES SMD 470 OHM 0.1% 1/4W 0805", Device Package="0805 (2012 Metric)", Manufacturer="Panasonic Electronic Components", Operating Temperature="-55°C ~ 155°C", Power (Watts)="0.25W, 1/4W", Ratings=AEC-Q200, Supplier Device Package=0805, Supplier Part Number 1=P20556CT-ND, Temperature Coefficient=±50ppm/°C, Tolerance=±0.1%, componentlink1description=Datasheet, componentlink1url=https://industrial.panasonic.com/cdbs/www-data/pdf/RDM0000/AOA0000C328.pdf, ComponentLink2Description="DigiKey Link", ComponentLink2URL=https://www.digikey.com/en/products/detail/panasonic-electronic-components/ERJ-PB6B4700V/6213339, Composition="Thick Film", Features="Automotive AEC-Q200", Height - Seated (Max)="0.028\" (0.70mm)", lastupdated="4/5/2026 8:11:23 PM", Lifecycle Status=Active, Minimum Order=1, Number of Terminations=2, Package / Case="0805 (2012 Metric)", Packaging=TapeAndReel, Part Number=ERJ-PB6B4700V, Part Status=Active, partid=28402, price=0.04, Resistance="470 Ohms", Series=ERJ-PB6, Size / Dimension="0.079\" L x 0.049\" W (2.00mm x 1.25mm)", Supplier 1=DigiKey
R10: library part CPF0805B1K0E, "RES SMD 1K OHM 0.1% 1/10W 0805", Device Package="0805 (2012 Metric)", Manufacturer="TE Connectivity Passive Product", Operating Temperature="-55°C ~ 155°C", Power (Watts)="0.1W, 1/10W", Supplier Device Package=0805, Supplier Part Number 1=A106044CT-ND, Temperature Coefficient=±25ppm/°C, Tolerance=±0.1%, componentlink1description=Datasheet, componentlink1url=https://www.te.com/commerce/DocumentDelivery/DDEController?Action=srchrtrv&DocNm=1773200&DocType=DS&DocLang=English, ComponentLink2Description="DigiKey Link", ComponentLink2URL=https://www.digikey.com/en/products/detail/te-connectivity-passive-product/CPF0805B1K0E/2390399, Composition="Thin Film", Height - Seated (Max)="0.026\" (0.65mm)", lastupdated="4/5/2026 8:11:26 PM", Lifecycle Status=Active, Minimum Order=1, Number of Terminations=2, Package / Case="0805 (2012 Metric)", Packaging=TapeAndReel, Part Number=CPF0805B1K0E, Part Status=Active, partid=27725, price=0.08, Resistance="1 kOhms", Series="CPF, Neohm", Size / Dimension="0.079\" L x 0.049\" W (2.00mm x 1.25mm)", Supplier 1=DigiKey
R12: library part TC33X-2-103E, "TRIMMER 10K OHM 0.15W J LEAD TOP", Manufacturer="Bourns Inc.", Power (Watts)=0.15W, Resistive Material=Cermet, Supplier Part Number 1=TC33X-103ECT-ND, Temperature Coefficient=±250ppm/°C, Tolerance=±25%, Adjustment Type="Top Adjustment", componentlink1description=Datasheet, componentlink1url=https://www.bourns.com/docs/Product-Datasheets/TC33.pdf, ComponentLink2Description="DigiKey Link", ComponentLink2URL=https://www.digikey.com/en/products/detail/bourns-inc/TC33X-2-103E/612858, lastupdated="4/5/2026 8:40:53 PM", Lifecycle Status=Active, Minimum Order=1, Mounting Type="Surface Mount", Number of Turns=1.0, Packaging=TapeAndReel, Part Number=TC33X-2-103E, Part Status=Active, partid=8, price=0.11, Resistance="10 kOhms", Series="Trimpot® TC33 - Open Frame", Size / Dimension="Rectangular - 0.150\" x 0.142\" Face (3.80mm x 3.60mm)", Supplier 1=DigiKey, Termination Style="J Lead"
R13: library part RCS0805100KFKEA, "RES SMD 100K OHM 1% 1/2W 0805", Device Package="0805 (2012 Metric)", Manufacturer="Vishay Dale", Operating Temperature="-55°C ~ 155°C", Power (Watts)="0.5W, 1/2W", Ratings=AEC-Q200, Supplier Device Package=0805, Supplier Part Number 1=541-2850-1-ND, Temperature Coefficient=±100ppm/°C, Tolerance=±1%, componentlink1description=Datasheet, componentlink1url=http://www.vishay.com/docs/20065/rcse3.pdf, ComponentLink2Description="DigiKey Link", ComponentLink2URL=https://www.digikey.com/en/products/detail/vishay-dale/RCS0805100KFKEA/5866996, Composition="Thick Film", Features="Automotive AEC-Q200, Pulse Withstanding", Height - Seated (Max)="0.020\" (0.50mm)", lastupdated="4/5/2026 8:11:26 PM", Lifecycle Status=Active, Minimum Order=1, Number of Terminations=2, Package / Case="0805 (2012 Metric)", Packaging=TapeAndReel, Part Number=RCS0805100KFKEA, Part Status=Active, partid=27789, price=0.02, Resistance="100 kOhms", Series="RCS e3", Size / Dimension="0.079\" L x 0.049\" W (2.00mm x 1.25mm)", Supplier 1=DigiKey
R14 R15: library part KRL1632E-M-R120-F-T5, "RES 0.12 OHM 1% 3/4W 1206", Device Package="1206 (3216 Metric)", Manufacturer=Susumu, Operating Temperature="-55°C ~ 155°C", Power (Watts)="0.75W, 3/4W", Ratings=AEC-Q200, Supplier Device Package=1206, Supplier Part Number 1=408-1583-1-ND, Temperature Coefficient=±50ppm/°C, Tolerance=±1%, componentlink1description=Datasheet, componentlink1url=http://www.susumu.co.jp/common/pdf/n_catalog_partition09_en.pdf, ComponentLink2Description="DigiKey Link", ComponentLink2URL=https://www.digikey.com/en/products/detail/susumu/KRL1632E-M-R120-F-T5/3738009, Composition="Metal Foil", Features="Automotive AEC-Q200, Current Sense", Height - Seated (Max)="0.028\" (0.70mm)", lastupdated="4/6/2026 8:00:54 PM", Lifecycle Status=Active, Minimum Order=1, Number of Terminations=2, Package / Case="1206 (3216 Metric)", Packaging=TapeAndReel, Part Number=KRL1632E-M-R120-F-T5, Part Status=Active, partid=26840, price=0.09, Resistance="120 mOhms", Series=KRL, Size / Dimension="0.126\" L x 0.063\" W (3.20mm x 1.60mm)", Supplier 1=DigiKey
R16 R17: library part RCS08054K70JNEA, "RES SMD 4.7K OHM 5% 1/2W 0805", Device Package="0805 (2012 Metric)", Manufacturer="Vishay Dale", Operating Temperature="-55°C ~ 155°C", Power (Watts)="0.5W, 1/2W", Ratings=AEC-Q200, Supplier Device Package=0805, Supplier Part Number 1=541-2866-1-ND, Temperature Coefficient=±200ppm/°C, Tolerance=±5%, componentlink1description=Datasheet, componentlink1url=http://www.vishay.com/docs/20065/rcse3.pdf, ComponentLink2Description="DigiKey Link", ComponentLink2URL=https://www.digikey.com/en/products/detail/vishay-dale/RCS08054K70JNEA/5867012, Composition="Thick Film", Features="Automotive AEC-Q200, Pulse Withstanding", Height - Seated (Max)="0.020\" (0.50mm)", lastupdated="4/5/2026 8:11:26 PM", Lifecycle Status=Active, Minimum Order=1, Number of Terminations=2, Package / Case="0805 (2012 Metric)", Packaging=TapeAndReel, Part Number=RCS08054K70JNEA, Part Status=Active, partid=27839, price=0.02, Resistance="4.7 kOhms", Series="RCS e3", Size / Dimension="0.079\" L x 0.049\" W (2.00mm x 1.25mm)", Supplier 1=DigiKey
R18: library part RNCS0805BKE1K00, "RES 1K OHM 0.1% 1/10W 0805", Device Package="0805 (2012 Metric)", Manufacturer="Stackpole Electronics Inc", Operating Temperature="-55°C ~ 155°C", Power (Watts)="0.1W, 1/10W", Ratings=AEC-Q200, Supplier Device Package=0805, Supplier Part Number 1=RNCS0805BKE1K00CT-ND, Temperature Coefficient=±25ppm/°C, Tolerance=±0.1%, componentlink1description=Datasheet, componentlink1url=https://www.seielect.com/catalog/sei-rncs_rnch.pdf, ComponentLink2Description="DigiKey Link", ComponentLink2URL=https://www.digikey.com/en/products/detail/stackpole-electronics-inc/RNCS0805BKE1K00/1800073, Composition="Thin Film", Features="Anti-Corrosive, Automotive AEC-Q200, Moisture Resistant", Height - Seated (Max)="0.026\" (0.65mm)", lastupdated="4/5/2026 8:11:26 PM", Lifecycle Status=Active, Minimum Order=1, Number of Terminations=2, Package / Case="0805 (2012 Metric)", Packaging=TapeAndReel, Part Number=RNCS0805BKE1K00, Part Status=Active, partid=27715, price=0.08, Resistance="1 kOhms", Series=RNCS, Size / Dimension="0.079\" L x 0.049\" W (2.00mm x 1.25mm)", Supplier 1=DigiKey
R19: library part CRCW0805120RFKEAHP, "RES SMD 120 OHM 1% 1/2W 0805", Device Package="0805 (2012 Metric)", Manufacturer="Vishay Dale", Operating Temperature="-55°C ~ 155°C", Power (Watts)="0.5W, 1/2W", Ratings=AEC-Q200, Supplier Device Package=0805, Supplier Part Number 1=541-120TCT-ND, Temperature Coefficient=±100ppm/°C, Tolerance=±1%, componentlink1description=Datasheet, componentlink1url=http://www.vishay.com/docs/20043/crcwhpe3.pdf, ComponentLink2Description="DigiKey Link", ComponentLink2URL=https://www.digikey.com/en/products/detail/vishay-dale/CRCW0805120RFKEAHP/2226864, Composition="Thick Film", Features="Automotive AEC-Q200, Pulse Withstanding", Height - Seated (Max)="0.024\" (0.60mm)", lastupdated="4/5/2026 8:11:15 PM", Lifecycle Status=Active, Minimum Order=1, Number of Terminations=2, Package / Case="0805 (2012 Metric)", Packaging=TapeAndReel, Part Number=CRCW0805120RFKEAHP, Part Status=Active, partid=30328, price=0.02, Resistance="120 Ohms", Series="CRCW-HP e3", Size / Dimension="0.079\" L x 0.049\" W (2.00mm x 1.25mm)", Supplier 1=DigiKey
S1: "4 Position, Through Hole, 2.54 mm Pitch, Raised Piano Slide Actuator, Convex Bottom, Long Pin, DIP Switch", Package=None, Check_prices=https://www.snapeda.com/parts/DS02C-254-1L-04BE/Same+Sky/view-part/?ref=eda, MF="Same Sky", MP=DS02C-254-1L-04BE, SnapEDA_Link=https://www.snapeda.com/parts/DS02C-254-1L-04BE/Same+Sky/view-part/?ref=snap
U1: "Bluetooth, WiFi 802.11b/g/n, Bluetooth v5.0 Transceiver Module 2.4GHz PCB Trace Surface Mount", Package=None, Availability="In Stock", Check_prices=https://www.snapeda.com/parts/ESP32-S3-WROOM-1-N4R2/Espressif+Systems/view-part/?ref=eda, MF="Espressif Systems", MP=ESP32-S3-WROOM-1-N4R2, price=None, Purchase-URL=https://pricing.snapeda.com/search/part/ESP32-S3-WROOM-1-N4R2/?ref=eda, SnapEDA_Link=https://www.snapeda.com/parts/ESP32-S3-WROOM-1-N4R2/Espressif+Systems/view-part/?ref=snap
U3: "1.5-A, 20-V, low-dropout voltage regulator with reverse current & reverse voltage protection", Package="SOT-223-4 Texas Instruments", Check_prices=https://www.snapeda.com/parts/TL1963A-33DCYR/Texas+Instruments/view-part/?ref=eda, MF="Texas Instruments", MP=TL1963A-33DCYR, SnapEDA_Link=https://www.snapeda.com/parts/TL1963A-33DCYR/Texas+Instruments/view-part/?ref=snap
U4: "Bipolar Motor Driver Power MOSFET Step/Direction, UART 28-QFN (5x5)", Package="VFQFN-28 Trinamic", Check_prices=https://www.snapeda.com/parts/TMC2209-LA-T/Trinamic/view-part/?ref=eda, MF="Trinamic Motion Control GmbH", MP=TMC2209-LA-T, SnapEDA_Link=https://www.snapeda.com/parts/TMC2209-LA-T/Trinamic/view-part/?ref=snap
U5: library part CMP-06298-000019-1, "IC CAN CONTROLLER SPI 14SOIC", RoHS Compliant=Yes
X1: library part XL2EL89CPI-111YLC-40M

## Free pads (board coordinates)
  round 5.5 hole 3.2: 4(5,5) 5(5,75) 6(75,5) 7(75,75)

## Via types
v1: diameter 0.6, hole 0.3, Top Layer to Bottom Layer, 74 vias
v2: diameter 0.8, hole 0.6, Top Layer to Bottom Layer, 2 vias

## Nets (pads, with @x,y where several pads share a name; then routed paths per layer and width w, separated by ;. In a path a pad name is that pad's centre, name@x,y a point inside that pad or via, vN(x,y) a via of type N, cw(c..) or ccw(c..) an arc to the next point about the centre after c; other vN are vias at no path point)
5V_OUT: C14.1 R11.2 U4.8 | length 25.4
  Top Layer w0.279: R11.2 10.35,51.124 11.249,50.225 v1(11.3,50.225) ; U4.8 22.85,39.6 24.05,38.4 C14.1 v1(22.4,38.4)
  Bottom Layer w0.279: v1(11.3,50.225) 11.365,50.225 11.94,49.65 15.099,49.65 22.4,42.349 v1(22.4,38.4)
+5: C6.1 C8.2 J7.1 U3.1
AS5600_OUT: IC1.3 U1.13 | length 32.8
  Top Layer w0.279: U1.13 29.02,63.175 v1(31.75,63.175)
  Bottom Layer w0.279: v1(31.75,63.175) 31.7,63.125 31.7,61.45 35.25,57.9 35.25,43.925 36.25,42.925 37.732,42.925 41.292,39.365 IC1.3
AS5600_SDA: IC1.6 R16.1 U1.12 | length 39.8
  Top Layer w0.279: U1.12 29.055,64.4 v1(30.675,64.4)
  Bottom Layer w0.279: v1(30.675,64.4) 29.993,63.718 29.993,43.468 29.406,42.881 29.406,37.019 30.1,36.325 31.55,36.325 32.32,37.095 32.32,38.395 R16.1 34.775,38.4 35.74,39.365 IC1.6
AS5600_SDL: IC1.7 R17.1 U1.17 | length 25.6
  Top Layer w0.279: U1.17 33.325,60.645 v1(33.325,58.775)
  Bottom Layer w0.279: v1(33.325,58.775) 32.075,57.525 32.075,40.85 R17.1 32.31,40.635 IC1.7
CAN_CS: U1.18 U5.13 | length 40.6
  Top Layer w0.279: U1.18 34.59,60.35 35.102,59.838 35.102,59.831 40.058,54.875 52.025,54.875 55.075,51.825 55.075,45.525 56.125,44.475 64.523,44.475 U5.13
CAN_INT: U1.22 U5.4 | length 70.2
  Top Layer w0.279: U1.22 39.67,60.35 40.182,59.838 40.182,59.831 42.038,57.975 76.1,57.975 77.9,56.175 78.275,55.8 78.275,41 77.625,40.35 72.764,40.35 72.6,40.514 72.6,45.175 70.757,47.018 69.442,47.018 U5.4
CAN_MISO: U1.21 U5.12 | length 35.5
  Top Layer w0.279: U1.21 38.4,60.35 38.912,59.838 38.912,59.831 41.443,57.3 v1(50.833,57.3) ; v1(62.2,45.8) 62.205,45.795 64.563,45.795 U5.12
  Bottom Layer w0.279: v1(50.833,57.3) 55.85,52.283 55.85,47.175 57.225,45.8 v1(62.2,45.8)
CAN_MOSI: U1.19 U5.11 | length 38.2